# Allegro board 2-lianxi.brd
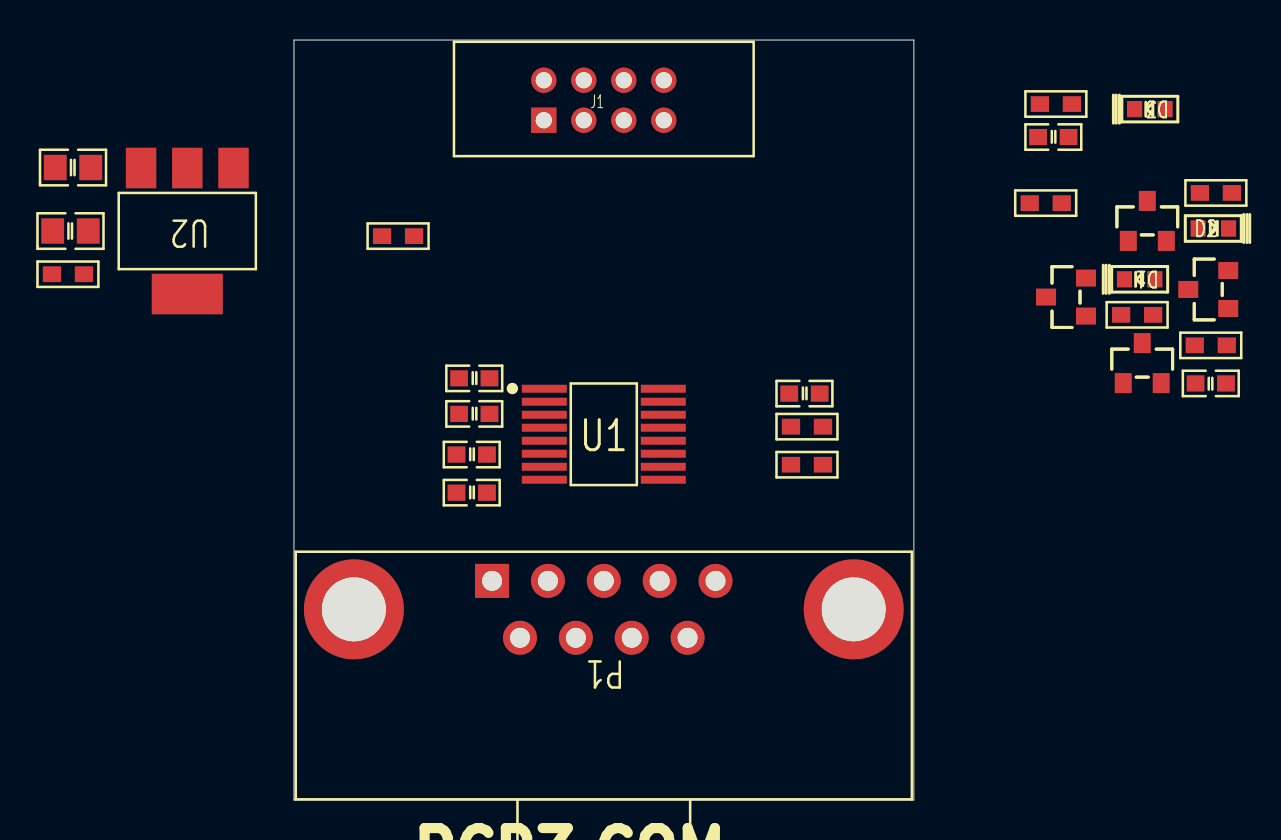
[diagram p0: board, top side]
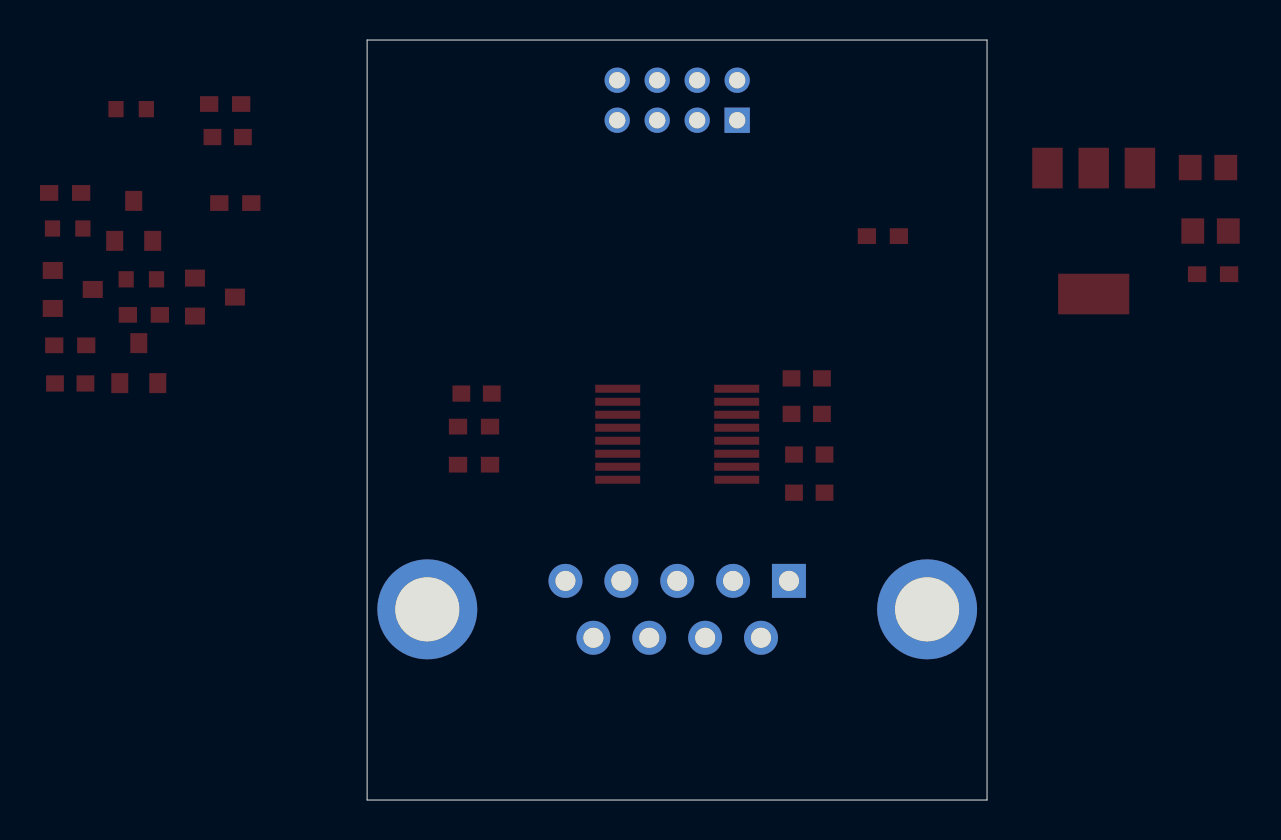
[diagram p1: board, bottom side, seen from below]

Outline 31 x 38 mm; copper layers: TOP, BOTTOM. Coordinates in mm from the lower left corner of the outline.
Outline path: 0,38 0,0 31,0 31,38 0,38

## Design rules (mm)
constraint set DEFAULT: min track width 0.203
net group POWERS_2_AGND: nets GND

## Placement (name value [footprint] x y rotation side)
C1  0.1uF  [C0603]  9.02 19.3 180 top
C2  0.1uF  [C0603]  9.02 21.08 180 top
C3  0.1uF  [C0603]  25.53 20.32 180 top
C4  0.1uF  [C0603]  8.89 15.37 180 top
C5  0.1uF  [C0603]  8.89 17.27 180 top
C6  1uF  [C0603]  45.85 20.83 0 top
C7  10uF  [C0805]  -11.05 31.62 180 top
C8  10uF  [C0805]  -11.18 28.45 180 top
C9  1uF  [C0603]  37.97 33.15 180 top
D1  LED_GREEN  [LED0603]  42.29 26.04 180 top
D2  LED_GREEN  [LED0603]  45.97 28.57 0 top
D3  LED_GREEN  [LED0603]  42.8 34.54 180 top
J1  CONNECTOR  [DIP_2X4_2MM]  15.49 34.99 0 top
P1  -  [DB9_MALE]  27.99 9.53 180 top
Q1  2N5401  [SOT-23]  45.72 25.53 90 top
Q2  2N5401  [SOT-23]  42.42 21.84 0 top
Q3  2N5401  [SOT-23]  42.67 28.96 0 top
Q4  2N5401  [SOT-23]  38.61 25.15 90 top
R1  1K  [R0603]  45.85 22.73 0 top
R2  1K  [R0603]  25.65 16.76 0 top
R3  470R  [R0603]  42.16 24.26 0 top
R4  470R  [R0603]  46.1 30.35 180 top
R5  50K/1%  [R0603]  5.21 28.19 0 top
R6  82K/1%  [R0603]  -11.3 26.29 0 top
R7  1K  [R0603]  38.1 34.8 0 top
R8  1K  [R0603]  25.65 18.67 0 top
R9  470R  [R0603]  37.59 29.84 0 top
U1  SP3232EEY  [TSSOP16]  15.49 18.29 0 top
U2  -  [LM1117-ADJ]  -5.33 28.45 180 top

## Library data of the parts
C1-C5 = CAP NP_3
C6-C9 = CAP NP_2
D1 D3 = LED_5
D2 = LED_6
J1 = CONNECTOR_1
P1 = DB9_MALE_1
Q1-Q4 = 2N5401_2
R1-R9 = RES_2
U1 = SP3232EEY_1
U2 = LM1117_0

## Footprints (pads in the part's own frame, mm; a bottom-side part is the same pattern mirrored in y, then rotated)
C0603
  rect 0.889x0.813 smd: 1(-0.762,0) 2(0.762,0)
C0805
  rect 1.143x1.27 smd: 1(-0.889,0) 2(0.889,0)
DB9_MALE
  rect 1.7x1.7 hole 1: 1(18.085,-1.422)
  round 1.7 hole 1: 2(15.291,-1.422) 3(12.497,-1.422) 4(9.703,-1.422) 5(6.909,-1.422) 6(16.688,1.422) 7(13.894,1.422) 8(11.1,1.422) 9(8.306,1.422)
  round 5 hole 3.2: 10(0,0) 11(24.994,0)
DIP_2X4_2MM
  rect 1.27x1.27 hole 0.813: 1(-3,-1)
  round 1.27 hole 0.813: 2(-3,1) 3(-1,-1) 4(-1,1) 5(1,-1) 6(1,1) 7(3,-1) 8(3,1)
LED0603
  rect 0.762x0.813 smd: 1(-0.76,0) 2(0.76,0)
LM1117-ADJ
  rect 1.524x2.032 smd: 1(-2.311,-3.15) 2(0,-3.15) 3(2.311,-3.15)
  rect 3.556x2.032 smd: 4(0,3.15)
R0603
  rect 0.914x0.787 smd: 1(-0.8,0) 2(0.8,0)
SOT-23
  rect 0.85x1 smd: 1(-0.95,-1) 2(0.95,-1) 3(0,1)
TSSOP16
  rect 2.25x0.4 smd: 1(-2.975,2.275) 2(-2.975,1.625) 3(-2.975,0.975) 4(-2.975,0.325) 5(-2.975,-0.325) 6(-2.975,-0.975) 7(-2.975,-1.625) 8(-2.975,-2.275) 9(2.975,-2.275) 10(2.975,-1.625) 11(2.975,-0.975) 12(2.975,-0.325) 13(2.975,0.325) 14(2.975,0.975) 15(2.975,1.625) 16(2.975,2.275)

## Nets
GND: C2.2 C3.1 C4.2 C6.2 C7.2 C8.2 C9.2 J1.2(8) J1.3 P1.5 P1.10 P1.11 Q2.3 Q4.3 R3.2 R4.2 R5.2 R9.2 U1.15
VCC_3V3: C3.2 C8.1 D2.1 Q1.2(EMITTER) Q3.2(EMITTER) R6.2 U1.16(VCC) U2.2 U2.4(TAB)
VIN_5V: C7.1 J1.1 U2.3
RS232_CTS: P1.8 U1.7
RS232_RTS: P1.7 U1.8
RS232_RXD: P1.2 U1.13
RS232_TXD: P1.3 U1.14
UART_CTS: J1.8 U1.10
UART_RTS: J1.6 U1.9
UART_RXD: J1.7 R8.1 U1.12
UART_TXD: J1.5 R2.1 U1.11
N23451873: C1.1 U1.1
N23451905: C5.1 U1.4
N23451907: C1.2 U1.3
N23451913: C4.1 U1.6
N23451915: C2.1 U1.2
N23451921: C5.2 U1.5
N23452119: R5.1 R6.1 U2.1
N23452223: Q2.1 R2.2
N23452239: Q1.1 R1.2
N23452241: C6.1 Q2.2(EMITTER) R1.1
N23452262: D1.1 Q1.3
N23452331: Q4.1 R8.2
N23452347: Q3.1 R7.2
N23452349: C9.1 Q4.2(EMITTER) R7.1
N23452367: D3.1 Q3.3
N23452380: D3.2(CATHODE) R9.1
N234520751: D2.2(CATHODE) R4.1
N234522811: D1.2(CATHODE) R3.1

Pads without a net: J1 4; P1 1 4 6 9

## Text on the board
Ref Des/Silkscreen Top: PCB3.COM
